# Altium PCB RGBM.PcbDoc (part 1 of 3)
Units mil, origin at the board's own origin, x right, y up, seen from the top; angles counter-clockwise.
Board outline 10650 x 5000 mil, 2 copper layers (Top Layer, Bottom Layer); 598 components, 309 nets, 1806 pads, 0 vias.
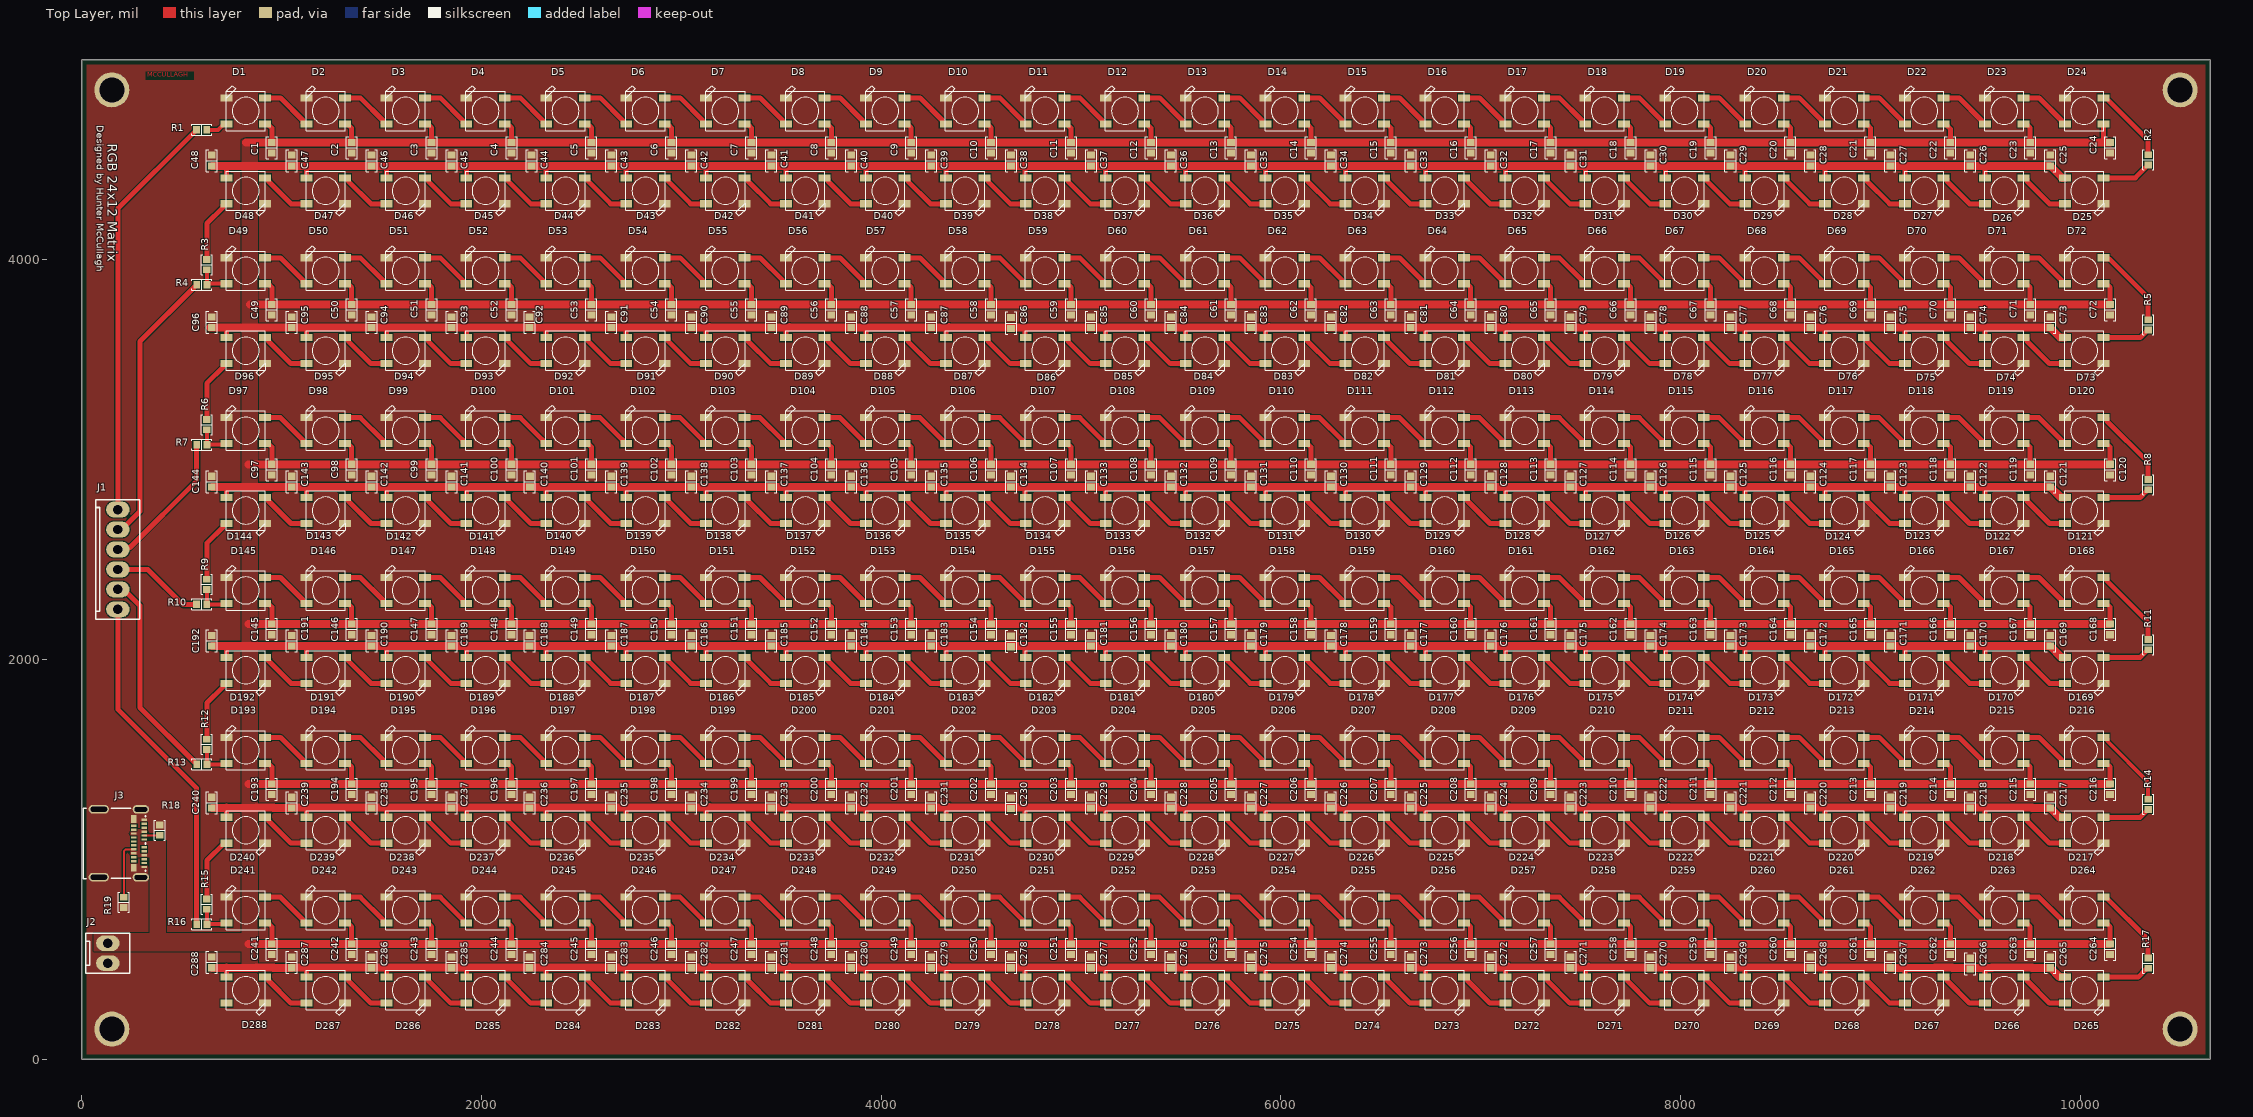
[diagram p0: Top Layer view]
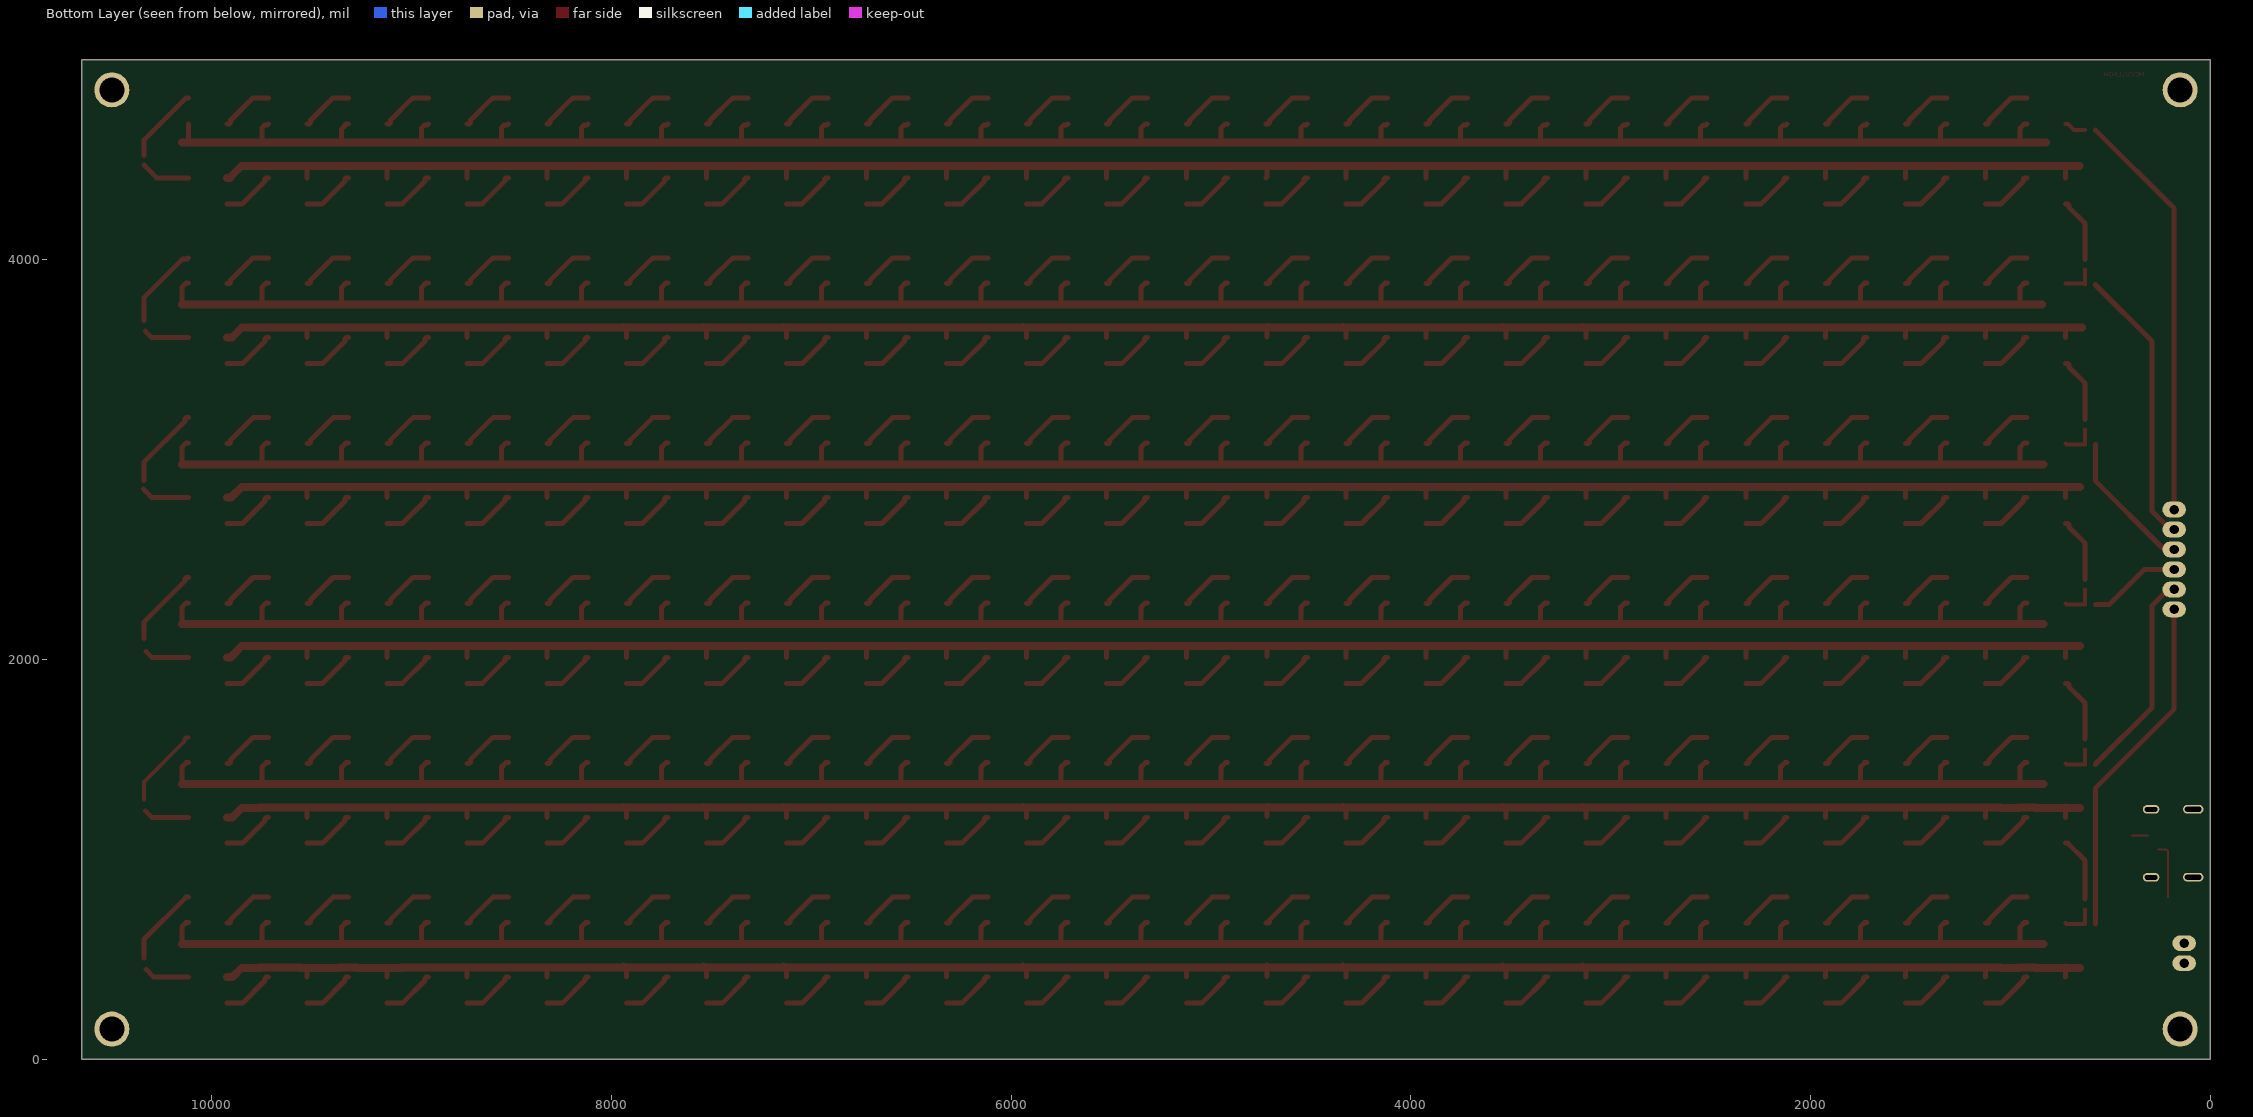
[diagram p1: Bottom Layer view, seen from below]
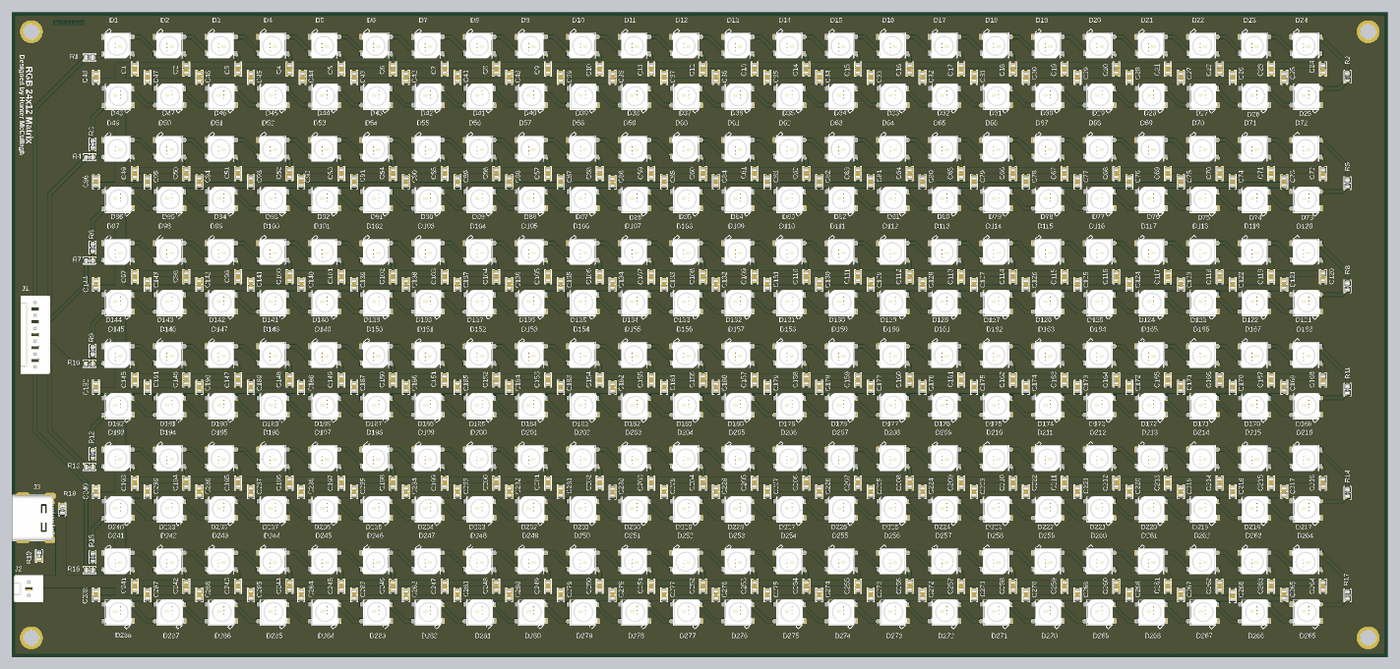
[diagram p4: 3D render of the assembled board from above, using the file's embedded part models]

## Layer stack, top to bottom
Top Solder: solder mask 0.4, Solder Resist, Dk 3.5
Top Layer: signal copper 1.4
Dielectric 1: dielectric 12.6, FR-4, Dk 4.8
Bottom Layer: signal copper 1.4
Bottom Solder: solder mask 0.4, Solder Resist, Dk 3.5

## Board outline
0,0 10650,0 10650,5000 0,5000

## Design rules (kind name [scope] priority, off if disabled: settings)
Clearance [All] p1: gap=5 ignorepadtopadclearanceinfootprint=FALSE
HoleSize [All] p1: absolutevalues=TRUE maxlimit=1000 minlimit=1 maxpercent=80.000 minpercent=20.000
MinimumSolderMaskSliver [All] p1: minsoldermaskwidth=1
PolygonConnect PolygonConnect_1 [All vs IsNamedPolygon('GND_L01_P002')] p1: connectstyle=Direct reliefconductorwidth=10 reliefentries=4 polygonreliefangle="90 Angle" airgapwidth=10
PolygonConnect [All] p2: connectstyle=Relief reliefconductorwidth=10 reliefentries=4 polygonreliefangle="90 Angle" airgapwidth=10
RoutingVias [All] p1: holewidth=28 width=50 viastyle="Through Hole" minholewidth=28 minwidth=50 maxholewidth=28 maxwidth=50
SilkToSilkClearance [All] p1: silktosilkclearance=1
SilkToSolderMaskClearance [IsPad] p1: minsilkscreentomaskgap=0 clearancetoexposedcopper=TRUE
SolderMaskExpansion [All] p1: expansion=4 istentingtop=FALSE
SupplyNets "Schematic Supply Nets_1" [InNet('+5V')] p1: voltage=0.000
SupplyNets "Schematic Supply Nets" [InNet('GND')] p2: voltage=0.000
Width [All] p1: maxlimit=200 minlimit=10 preferedwidth=10
26 further rules are at their usual default settings.

## Classes and differential pairs
component class RGBM-07: J1 J2 J3 R18 R19
component class RGBM-06: C241 C242 C243 C244 C245 C246 C247 C248 C249 C250 C251 C252 C253 C254 C255 C256 C257 C258 C259 C260 C261 C262 C263 C264 C265 C266 C267 C268 C269 C270 C271 C272 C273 C274 C275 C276 C277 C278 C279 C280 C281 C282 C283 C284 C285 C286 C287 C288 D241 D242 D243 D244 D245 D246 D247 D248 D249 D250 D251 D252 D253 D254 D255 D256 D257 D258 D259 D260 D261 D262 D263 D264 D265 D266 D267 D268 D269 D270 D271 D272 D273 D274 D275 D276 D277 D278 D279 D280 D281 D282 D283 D284 D285 D286 D287 D288 R15 R16 R17
component class RGBM-05: C193 C194 C195 C196 C197 C198 C199 C200 C201 C202 C203 C204 C205 C206 C207 C208 C209 C210 C211 C212 C213 C214 C215 C216 C217 C218 C219 C220 C221 C222 C223 C224 C225 C226 C227 C228 C229 C230 C231 C232 C233 C234 C235 C236 C237 C238 C239 C240 D193 D194 D195 D196 D197 D198 D199 D200 D201 D202 D203 D204 D205 D206 D207 D208 D209 D210 D211 D212 D213 D214 D215 D216 D217 D218 D219 D220 D221 D222 D223 D224 D225 D226 D227 D228 D229 D230 D231 D232 D233 D234 D235 D236 D237 D238 D239 D240 R12 R13 R14
component class RGBM-04: C145 C146 C147 C148 C149 C150 C151 C152 C153 C154 C155 C156 C157 C158 C159 C160 C161 C162 C163 C164 C165 C166 C167 C168 C169 C170 C171 C172 C173 C174 C175 C176 C177 C178 C179 C180 C181 C182 C183 C184 C185 C186 C187 C188 C189 C190 C191 C192 D145 D146 D147 D148 D149 D150 D151 D152 D153 D154 D155 D156 D157 D158 D159 D160 D161 D162 D163 D164 D165 D166 D167 D168 D169 D170 D171 D172 D173 D174 D175 D176 D177 D178 D179 D180 D181 D182 D183 D184 D185 D186 D187 D188 D189 D190 D191 D192 R9 R10 R11
component class RGBM-03: C97 C98 C99 C100 C101 C102 C103 C104 C105 C106 C107 C108 C109 C110 C111 C112 C113 C114 C115 C116 C117 C118 C119 C120 C121 C122 C123 C124 C125 C126 C127 C128 C129 C130 C131 C132 C133 C134 C135 C136 C137 C138 C139 C140 C141 C142 C143 C144 D97 D98 D99 D100 D101 D102 D103 D104 D105 D106 D107 D108 D109 D110 D111 D112 D113 D114 D115 D116 D117 D118 D119 D120 D121 D122 D123 D124 D125 D126 D127 D128 D129 D130 D131 D132 D133 D134 D135 D136 D137 D138 D139 D140 D141 D142 D143 D144 R6 R7 R8
component class RGBM-02: C49 C50 C51 C52 C53 C54 C55 C56 C57 C58 C59 C60 C61 C62 C63 C64 C65 C66 C67 C68 C69 C70 C71 C72 C73 C74 C75 C76 C77 C78 C79 C80 C81 C82 C83 C84 C85 C86 C87 C88 C89 C90 C91 C92 C93 C94 C95 C96 D49 D50 D51 D52 D53 D54 D55 D56 D57 D58 D59 D60 D61 D62 D63 D64 D65 D66 D67 D68 D69 D70 D71 D72 D73 D74 D75 D76 D77 D78 D79 D80 D81 D82 D83 D84 D85 D86 D87 D88 D89 D90 D91 D92 D93 D94 D95 D96 R3 R4 R5
component class RGBM-01: C1 C2 C3 C4 C5 C6 C7 C8 C9 C10 C11 C12 C13 C14 C15 C16 C17 C18 C19 C20 C21 C22 C23 C24 C25 C26 C27 C28 C29 C30 C31 C32 C33 C34 C35 C36 C37 C38 C39 C40 C41 C42 C43 C44 C45 C46 C47 C48 D1 D2 D3 D4 D5 D6 D7 D8 D9 D10 D11 D12 D13 D14 D15 D16 D17 D18 D19 D20 D21 D22 D23 D24 D25 D26 D27 D28 D29 D30 D31 D32 D33 D34 D35 D36 D37 D38 D39 D40 D41 D42 D43 D44 D45 D46 D47 D48 R1 R2

## Components (designator, comment, footprint, x,y, rotation, side; value= is the part's Value field where it differs from the comment)
C1 "0.1 µF" "CAP 0603_1608" 950,4560 r90 top
C2 "0.1 µF" "CAP 0603_1608" 1350,4560 r90 top
C3 "0.1 µF" "CAP 0603_1608" 1750,4560 r90 top
C4 "0.1 µF" "CAP 0603_1608" 2150,4560 r90 top
C5 "0.1 µF" "CAP 0603_1608" 2550,4560 r90 top
C6 "0.1 µF" "CAP 0603_1608" 2950,4560 r90 top
C7 "0.1 µF" "CAP 0603_1608" 3350,4560 r90 top
C8 "0.1 µF" "CAP 0603_1608" 3750,4560 r90 top
C9 "0.1 µF" "CAP 0603_1608" 4150,4560 r90 top
C10 "0.1 µF" "CAP 0603_1608" 4550,4560 r90 top
C11 "0.1 µF" "CAP 0603_1608" 4950,4560 r90 top
C12 "0.1 µF" "CAP 0603_1608" 5350,4560 r90 top
C13 "0.1 µF" "CAP 0603_1608" 5750,4560 r90 top
C14 "0.1 µF" "CAP 0603_1608" 6150,4560 r90 top
C15 "0.1 µF" "CAP 0603_1608" 6550,4560 r90 top
C16 "0.1 µF" "CAP 0603_1608" 6950,4560 r90 top
C17 "0.1 µF" "CAP 0603_1608" 7350,4560 r90 top
C18 "0.1 µF" "CAP 0603_1608" 7750,4560 r90 top
C19 "0.1 µF" "CAP 0603_1608" 8150,4560 r90 top
C20 "0.1 µF" "CAP 0603_1608" 8550,4560 r90 top
C21 "0.1 µF" "CAP 0603_1608" 8950,4560 r90 top
C22 "0.1 µF" "CAP 0603_1608" 9350,4560 r90 top
C23 "0.1 µF" "CAP 0603_1608" 9750,4560 r90 top
C24 "0.1 µF" "CAP 0603_1608" 10150,4560 r90 top
C25 "0.1 µF" "CAP 0603_1608" 9850,4496.57 r270 top
C26 "0.1 µF" "CAP 0603_1608" 9450,4496.57 r270 top
C27 "0.1 µF" "CAP 0603_1608" 9050,4496.57 r270 top
C28 "0.1 µF" "CAP 0603_1608" 8650,4496.57 r270 top
C29 "0.1 µF" "CAP 0603_1608" 8250,4496.57 r270 top
C30 "0.1 µF" "CAP 0603_1608" 7850,4496.57 r270 top
C31 "0.1 µF" "CAP 0603_1608" 7450,4496.57 r270 top
C32 "0.1 µF" "CAP 0603_1608" 7050,4496.57 r270 top
C33 "0.1 µF" "CAP 0603_1608" 6650,4496.57 r270 top
C34 "0.1 µF" "CAP 0603_1608" 6250,4496.57 r270 top
C35 "0.1 µF" "CAP 0603_1608" 5850,4496.57 r270 top
C36 "0.1 µF" "CAP 0603_1608" 5450,4496.57 r270 top
C37 "0.1 µF" "CAP 0603_1608" 5050,4496.57 r270 top
C38 "0.1 µF" "CAP 0603_1608" 4650,4496.57 r270 top
C39 "0.1 µF" "CAP 0603_1608" 4250,4496.57 r270 top
C40 "0.1 µF" "CAP 0603_1608" 3850,4496.57 r270 top
C41 "0.1 µF" "CAP 0603_1608" 3450,4496.57 r270 top
C42 "0.1 µF" "CAP 0603_1608" 3050,4496.57 r270 top
C43 "0.1 µF" "CAP 0603_1608" 2650,4496.57 r270 top
C44 "0.1 µF" "CAP 0603_1608" 2250,4496.57 r270 top
C45 "0.1 µF" "CAP 0603_1608" 1850,4496.57 r270 top
C46 "0.1 µF" "CAP 0603_1608" 1450,4496.57 r270 top
C47 "0.1 µF" "CAP 0603_1608" 1050,4496.57 r270 top
C48 "0.1 µF" "CAP 0603_1608" 650,4496.57 r270 top
C49 "0.1 µF" "CAP 0603_1608" 950,3750 r90 top
C50 "0.1 µF" "CAP 0603_1608" 1350,3750 r90 top
C51 "0.1 µF" "CAP 0603_1608" 1750,3750 r90 top
C52 "0.1 µF" "CAP 0603_1608" 2150,3750 r90 top
C53 "0.1 µF" "CAP 0603_1608" 2550,3750 r90 top
C54 "0.1 µF" "CAP 0603_1608" 2950,3750 r90 top
C55 "0.1 µF" "CAP 0603_1608" 3350,3750 r90 top
C56 "0.1 µF" "CAP 0603_1608" 3750,3750 r90 top
C57 "0.1 µF" "CAP 0603_1608" 4150,3750 r90 top
C58 "0.1 µF" "CAP 0603_1608" 4550,3750 r90 top
C59 "0.1 µF" "CAP 0603_1608" 4950,3750 r90 top
C60 "0.1 µF" "CAP 0603_1608" 5350,3750 r90 top
C61 "0.1 µF" "CAP 0603_1608" 5750,3750 r90 top
C62 "0.1 µF" "CAP 0603_1608" 6150,3750 r90 top
C63 "0.1 µF" "CAP 0603_1608" 6550,3750 r90 top
C64 "0.1 µF" "CAP 0603_1608" 6950,3750 r90 top
C65 "0.1 µF" "CAP 0603_1608" 7350,3750 r90 top
C66 "0.1 µF" "CAP 0603_1608" 7750,3750 r90 top
C67 "0.1 µF" "CAP 0603_1608" 8150,3750 r90 top
C68 "0.1 µF" "CAP 0603_1608" 8550,3750 r90 top
C69 "0.1 µF" "CAP 0603_1608" 8950,3750 r90 top
C70 "0.1 µF" "CAP 0603_1608" 9350,3750 r90 top
C71 "0.1 µF" "CAP 0603_1608" 9750,3750 r90 top
C72 "0.1 µF" "CAP 0603_1608" 10150,3750 r90 top
C73 "0.1 µF" "CAP 0603_1608" 9850,3686.57 r270 top
C74 "0.1 µF" "CAP 0603_1608" 9450,3686.57 r270 top
C75 "0.1 µF" "CAP 0603_1608" 9050,3686.57 r270 top
C76 "0.1 µF" "CAP 0603_1608" 8650,3686.57 r270 top
C77 "0.1 µF" "CAP 0603_1608" 8250,3686.57 r270 top
C78 "0.1 µF" "CAP 0603_1608" 7850,3686.57 r270 top
C79 "0.1 µF" "CAP 0603_1608" 7450,3686.57 r270 top
C80 "0.1 µF" "CAP 0603_1608" 7050,3686.57 r270 top
C81 "0.1 µF" "CAP 0603_1608" 6650,3686.57 r270 top
C82 "0.1 µF" "CAP 0603_1608" 6250,3686.57 r270 top
C83 "0.1 µF" "CAP 0603_1608" 5850,3686.57 r270 top
C84 "0.1 µF" "CAP 0603_1608" 5450,3686.57 r270 top
C85 "0.1 µF" "CAP 0603_1608" 5050,3686.57 r270 top
C86 "0.1 µF" "CAP 0603_1608" 4650,3683.43 r270 top
C87 "0.1 µF" "CAP 0603_1608" 4250,3686.57 r270 top
C88 "0.1 µF" "CAP 0603_1608" 3850,3686.57 r270 top
C89 "0.1 µF" "CAP 0603_1608" 3450,3686.57 r270 top
C90 "0.1 µF" "CAP 0603_1608" 3050,3686.57 r270 top
C91 "0.1 µF" "CAP 0603_1608" 2650,3686.57 r270 top
C92 "0.1 µF" "CAP 0603_1608" 2240,3686.57 r270 top
C93 "0.1 µF" "CAP 0603_1608" 1850,3686.57 r270 top
C94 "0.1 µF" "CAP 0603_1608" 1450,3686.57 r270 top
C95 "0.1 µF" "CAP 0603_1608" 1050,3686.57 r270 top
C96 "0.1 µF" "CAP 0603_1608" 650,3686.57 r270 top
C97 "0.1 µF" "CAP 0603_1608" 950,2950 r90 top
C98 "0.1 µF" "CAP 0603_1608" 1350,2950 r90 top
C99 "0.1 µF" "CAP 0603_1608" 1750,2950 r90 top
C100 "0.1 µF" "CAP 0603_1608" 2150,2950 r90 top
C101 "0.1 µF" "CAP 0603_1608" 2550,2950 r90 top
C102 "0.1 µF" "CAP 0603_1608" 2950,2950 r90 top
C103 "0.1 µF" "CAP 0603_1608" 3350,2950 r90 top
C104 "0.1 µF" "CAP 0603_1608" 3750,2950 r90 top
C105 "0.1 µF" "CAP 0603_1608" 4150,2950 r90 top
C106 "0.1 µF" "CAP 0603_1608" 4550,2950 r90 top
C107 "0.1 µF" "CAP 0603_1608" 4950,2950 r90 top
C108 "0.1 µF" "CAP 0603_1608" 5350,2950 r90 top
C109 "0.1 µF" "CAP 0603_1608" 5750,2950 r90 top
C110 "0.1 µF" "CAP 0603_1608" 6150,2950 r90 top
C111 "0.1 µF" "CAP 0603_1608" 6550,2950 r90 top
C112 "0.1 µF" "CAP 0603_1608" 6950,2950 r90 top
C113 "0.1 µF" "CAP 0603_1608" 7350,2950 r90 top
C114 "0.1 µF" "CAP 0603_1608" 7750,2950 r90 top
C115 "0.1 µF" "CAP 0603_1608" 8150,2950 r90 top
C116 "0.1 µF" "CAP 0603_1608" 8550,2950 r90 top
C117 "0.1 µF" "CAP 0603_1608" 8950,2950 r90 top
C118 "0.1 µF" "CAP 0603_1608" 9350,2950 r90 top
C119 "0.1 µF" "CAP 0603_1608" 9750,2950 r90 top
C120 "0.1 µF" "CAP 0603_1608" 10150,2950 r90 top
C121 "0.1 µF" "CAP 0603_1608" 9850,2890 r270 top
C122 "0.1 µF" "CAP 0603_1608" 9450,2890 r270 top
C123 "0.1 µF" "CAP 0603_1608" 9050,2890 r270 top
C124 "0.1 µF" "CAP 0603_1608" 8650,2890 r270 top
C125 "0.1 µF" "CAP 0603_1608" 8250,2890 r270 top
C126 "0.1 µF" "CAP 0603_1608" 7850,2890 r270 top
C127 "0.1 µF" "CAP 0603_1608" 7450,2890 r270 top
C128 "0.1 µF" "CAP 0603_1608" 7050,2890 r270 top
C129 "0.1 µF" "CAP 0603_1608" 6650,2890 r270 top
C130 "0.1 µF" "CAP 0603_1608" 6250,2890 r270 top
C131 "0.1 µF" "CAP 0603_1608" 5850,2890 r270 top
C132 "0.1 µF" "CAP 0603_1608" 5450,2890 r270 top
C133 "0.1 µF" "CAP 0603_1608" 5050,2890 r270 top
C134 "0.1 µF" "CAP 0603_1608" 4650,2890 r270 top
C135 "0.1 µF" "CAP 0603_1608" 4250,2890 r270 top
C136 "0.1 µF" "CAP 0603_1608" 3850,2890 r270 top
C137 "0.1 µF" "CAP 0603_1608" 3450,2890 r270 top
C138 "0.1 µF" "CAP 0603_1608" 3050,2890 r270 top
C139 "0.1 µF" "CAP 0603_1608" 2650,2890 r270 top
C140 "0.1 µF" "CAP 0603_1608" 2241.52,2890 r270 top
C141 "0.1 µF" "CAP 0603_1608" 1850,2890 r270 top
C142 "0.1 µF" "CAP 0603_1608" 1450,2890 r270 top
C143 "0.1 µF" "CAP 0603_1608" 1050,2890 r270 top
C144 "0.1 µF" "CAP 0603_1608" 650,2890 r270 top
C145 "0.1 µF" "CAP 0603_1608" 950,2150 r90 top
C146 "0.1 µF" "CAP 0603_1608" 1350,2150 r90 top
C147 "0.1 µF" "CAP 0603_1608" 1750,2150 r90 top
C148 "0.1 µF" "CAP 0603_1608" 2150,2150 r90 top
C149 "0.1 µF" "CAP 0603_1608" 2550,2150 r90 top
C150 "0.1 µF" "CAP 0603_1608" 2950,2150 r90 top
C151 "0.1 µF" "CAP 0603_1608" 3350,2150 r90 top
C152 "0.1 µF" "CAP 0603_1608" 3750,2150 r90 top
C153 "0.1 µF" "CAP 0603_1608" 4150,2150 r90 top
C154 "0.1 µF" "CAP 0603_1608" 4550,2150 r90 top
C155 "0.1 µF" "CAP 0603_1608" 4950,2150 r90 top
C156 "0.1 µF" "CAP 0603_1608" 5350,2150 r90 top
C157 "0.1 µF" "CAP 0603_1608" 5750,2150 r90 top
C158 "0.1 µF" "CAP 0603_1608" 6150,2150 r90 top
C159 "0.1 µF" "CAP 0603_1608" 6550,2150 r90 top
C160 "0.1 µF" "CAP 0603_1608" 6950,2150 r90 top
C161 "0.1 µF" "CAP 0603_1608" 7350,2150 r90 top
C162 "0.1 µF" "CAP 0603_1608" 7750,2150 r90 top
C163 "0.1 µF" "CAP 0603_1608" 8150,2150 r90 top
C164 "0.1 µF" "CAP 0603_1608" 8550,2150 r90 top
C165 "0.1 µF" "CAP 0603_1608" 8950,2150 r90 top
C166 "0.1 µF" "CAP 0603_1608" 9350,2150 r90 top
C167 "0.1 µF" "CAP 0603_1608" 9750,2150 r90 top
C168 "0.1 µF" "CAP 0603_1608" 10150,2150 r90 top
C169 "0.1 µF" "CAP 0603_1608" 9850,2093.43 r270 top
C170 "0.1 µF" "CAP 0603_1608" 9450,2093.43 r270 top
C171 "0.1 µF" "CAP 0603_1608" 9050,2093.43 r270 top
C172 "0.1 µF" "CAP 0603_1608" 8650,2093.43 r270 top
C173 "0.1 µF" "CAP 0603_1608" 8250,2093.43 r270 top
C174 "0.1 µF" "CAP 0603_1608" 7850,2093.43 r270 top
C175 "0.1 µF" "CAP 0603_1608" 7450,2093.43 r270 top
C176 "0.1 µF" "CAP 0603_1608" 7050,2093.43 r270 top
C177 "0.1 µF" "CAP 0603_1608" 6650,2093.43 r270 top
C178 "0.1 µF" "CAP 0603_1608" 6250,2093.43 r270 top
C179 "0.1 µF" "CAP 0603_1608" 5850,2093.43 r270 top
C180 "0.1 µF" "CAP 0603_1608" 5450,2093.43 r270 top
C181 "0.1 µF" "CAP 0603_1608" 5050,2093.43 r270 top
C182 "0.1 µF" "CAP 0603_1608" 4650,2090 r270 top
C183 "0.1 µF" "CAP 0603_1608" 4250,2093.43 r270 top
C184 "0.1 µF" "CAP 0603_1608" 3850,2093.43 r270 top
C185 "0.1 µF" "CAP 0603_1608" 3450,2093.43 r270 top
C186 "0.1 µF" "CAP 0603_1608" 3050,2093.43 r270 top
C187 "0.1 µF" "CAP 0603_1608" 2650,2093.43 r270 top
C188 "0.1 µF" "CAP 0603_1608" 2240,2093.43 r270 top
C189 "0.1 µF" "CAP 0603_1608" 1850,2093.43 r270 top
C190 "0.1 µF" "CAP 0603_1608" 1450,2093.43 r270 top
C191 "0.1 µF" "CAP 0603_1608" 1050,2093.43 r270 top
C192 "0.1 µF" "CAP 0603_1608" 650,2093.43 r270 top
C193 "0.1 µF" "CAP 0603_1608" 950,1350 r90 top
C194 "0.1 µF" "CAP 0603_1608" 1350,1350 r90 top
C195 "0.1 µF" "CAP 0603_1608" 1750,1350 r90 top
C196 "0.1 µF" "CAP 0603_1608" 2150,1350 r90 top
C197 "0.1 µF" "CAP 0603_1608" 2550,1350 r90 top
C198 "0.1 µF" "CAP 0603_1608" 2950,1350 r90 top
C199 "0.1 µF" "CAP 0603_1608" 3350,1350 r90 top
C200 "0.1 µF" "CAP 0603_1608" 3750,1350 r90 top
C201 "0.1 µF" "CAP 0603_1608" 4150,1350 r90 top
C202 "0.1 µF" "CAP 0603_1608" 4550,1350 r90 top
C203 "0.1 µF" "CAP 0603_1608" 4950,1350 r90 top
C204 "0.1 µF" "CAP 0603_1608" 5350,1350 r90 top
C205 "0.1 µF" "CAP 0603_1608" 5750,1350 r90 top
C206 "0.1 µF" "CAP 0603_1608" 6150,1350 r90 top
C207 "0.1 µF" "CAP 0603_1608" 6550,1350 r90 top
C208 "0.1 µF" "CAP 0603_1608" 6950,1350 r90 top
C209 "0.1 µF" "CAP 0603_1608" 7350,1350 r90 top
C210 "0.1 µF" "CAP 0603_1608" 7750,1350 r90 top
C211 "0.1 µF" "CAP 0603_1608" 8150,1350 r90 top
C212 "0.1 µF" "CAP 0603_1608" 8550,1350 r90 top
C213 "0.1 µF" "CAP 0603_1608" 8950,1350 r90 top
C214 "0.1 µF" "CAP 0603_1608" 9350,1350 r90 top
C215 "0.1 µF" "CAP 0603_1608" 9750,1350 r90 top
C216 "0.1 µF" "CAP 0603_1608" 10150,1350 r90 top
C217 "0.1 µF" "CAP 0603_1608" 9850,1283.43 r270 top
C218 "0.1 µF" "CAP 0603_1608" 9450,1283.43 r270 top
C219 "0.1 µF" "CAP 0603_1608" 9050,1283.43 r270 top
C220 "0.1 µF" "CAP 0603_1608" 8650,1283.43 r270 top
C221 "0.1 µF" "CAP 0603_1608" 8250,1283.43 r270 top
C222 "0.1 µF" "CAP 0603_1608" 7850,1283.43 r270 top
C223 "0.1 µF" "CAP 0603_1608" 7450,1283.43 r270 top
C224 "0.1 µF" "CAP 0603_1608" 7050,1283.43 r270 top
C225 "0.1 µF" "CAP 0603_1608" 6650,1283.43 r270 top
C226 "0.1 µF" "CAP 0603_1608" 6250,1283.43 r270 top
C227 "0.1 µF" "CAP 0603_1608" 5850,1283.43 r270 top
C228 "0.1 µF" "CAP 0603_1608" 5450,1283.43 r270 top
C229 "0.1 µF" "CAP 0603_1608" 5050,1283.43 r270 top
C230 "0.1 µF" "CAP 0603_1608" 4650,1280 r270 top
C231 "0.1 µF" "CAP 0603_1608" 4250,1283.43 r270 top
C232 "0.1 µF" "CAP 0603_1608" 3850,1283.43 r270 top
C233 "0.1 µF" "CAP 0603_1608" 3450,1283.43 r270 top
C234 "0.1 µF" "CAP 0603_1608" 3050,1283.43 r270 top
C235 "0.1 µF" "CAP 0603_1608" 2650,1283.43 r270 top
C236 "0.1 µF" "CAP 0603_1608" 2240,1283.43 r270 top
C237 "0.1 µF" "CAP 0603_1608" 1850,1283.43 r270 top
C238 "0.1 µF" "CAP 0603_1608" 1450,1283.43 r270 top
C239 "0.1 µF" "CAP 0603_1608" 1050,1283.43 r270 top
C240 "0.1 µF" "CAP 0603_1608" 650,1283.43 r270 top
C241 "0.1 µF" "CAP 0603_1608" 950,550 r90 top
C242 "0.1 µF" "CAP 0603_1608" 1350,550 r90 top
C243 "0.1 µF" "CAP 0603_1608" 1750,550 r90 top
C244 "0.1 µF" "CAP 0603_1608" 2150,550 r90 top
C245 "0.1 µF" "CAP 0603_1608" 2550,550 r90 top
C246 "0.1 µF" "CAP 0603_1608" 2950,550 r90 top
C247 "0.1 µF" "CAP 0603_1608" 3350,550 r90 top
C248 "0.1 µF" "CAP 0603_1608" 3750,550 r90 top
C249 "0.1 µF" "CAP 0603_1608" 4150,550 r90 top
C250 "0.1 µF" "CAP 0603_1608" 4550,550 r90 top
C251 "0.1 µF" "CAP 0603_1608" 4950,550 r90 top
C252 "0.1 µF" "CAP 0603_1608" 5350,550 r90 top
C253 "0.1 µF" "CAP 0603_1608" 5750,550 r90 top
C254 "0.1 µF" "CAP 0603_1608" 6150,550 r90 top
C255 "0.1 µF" "CAP 0603_1608" 6550,550 r90 top
C256 "0.1 µF" "CAP 0603_1608" 6950,550 r90 top
C257 "0.1 µF" "CAP 0603_1608" 7350,550 r90 top
C258 "0.1 µF" "CAP 0603_1608" 7750,550 r90 top
C259 "0.1 µF" "CAP 0603_1608" 8150,550 r90 top
C260 "0.1 µF" "CAP 0603_1608" 8550,550 r90 top
C261 "0.1 µF" "CAP 0603_1608" 8950,550 r90 top
C262 "0.1 µF" "CAP 0603_1608" 9350,550 r90 top
C263 "0.1 µF" "CAP 0603_1608" 9750,550 r90 top
C264 "0.1 µF" "CAP 0603_1608" 10150,550 r90 top
C265 "0.1 µF" "CAP 0603_1608" 9850,483.43 r270 top
C266 "0.1 µF" "CAP 0603_1608" 9450,478.03 r270 top
C267 "0.1 µF" "CAP 0603_1608" 9050,483.43 r270 top
C268 "0.1 µF" "CAP 0603_1608" 8650,483.43 r270 top
C269 "0.1 µF" "CAP 0603_1608" 8250,483.43 r270 top
C270 "0.1 µF" "CAP 0603_1608" 7850,483.43 r270 top
C271 "0.1 µF" "CAP 0603_1608" 7450,483.43 r270 top
C272 "0.1 µF" "CAP 0603_1608" 7050,483.43 r270 top
C273 "0.1 µF" "CAP 0603_1608" 6650,483.43 r270 top
C274 "0.1 µF" "CAP 0603_1608" 6250,483.43 r270 top
C275 "0.1 µF" "CAP 0603_1608" 5850,483.43 r270 top
C276 "0.1 µF" "CAP 0603_1608" 5450,483.43 r270 top
C277 "0.1 µF" "CAP 0603_1608" 5050,483.43 r270 top
C278 "0.1 µF" "CAP 0603_1608" 4650,483.43 r270 top
C279 "0.1 µF" "CAP 0603_1608" 4250,483.43 r270 top
C280 "0.1 µF" "CAP 0603_1608" 3850,483.43 r270 top
C281 "0.1 µF" "CAP 0603_1608" 3450,483.43 r270 top
C282 "0.1 µF" "CAP 0603_1608" 3050,483.43 r270 top
C283 "0.1 µF" "CAP 0603_1608" 2650,483.43 r270 top
C284 "0.1 µF" "CAP 0603_1608" 2240,483.43 r270 top
C285 "0.1 µF" "CAP 0603_1608" 1850,483.43 r270 top
C286 "0.1 µF" "CAP 0603_1608" 1450,483.43 r270 top
C287 "0.1 µF" "CAP 0603_1608" 1050,483.43 r270 top
C288 "0.1 µF" "CAP 0603_1608" 650,483.43 r270 top
D1 "WS2812B" *WS2812B_WS2812B(Primary) 820,4745 r0 top
D2 "WS2812B" *WS2812B_WS2812B(Primary) 1220,4745 r0 top
D3 "WS2812B" *WS2812B_WS2812B(Primary) 1620,4745 r0 top
D4 "WS2812B" *WS2812B_WS2812B(Primary) 2020,4745 r0 top
D5 "WS2812B" *WS2812B_WS2812B(Primary) 2420,4745 r0 top
D6 "WS2812B" *WS2812B_WS2812B(Primary) 2820,4745 r0 top
D7 "WS2812B" *WS2812B_WS2812B(Primary) 3220,4745 r0 top
D8 "WS2812B" *WS2812B_WS2812B(Primary) 3620,4745 r0 top
D9 "WS2812B" *WS2812B_WS2812B(Primary) 4020,4745 r0 top
D10 "WS2812B" *WS2812B_WS2812B(Primary) 4420,4745 r0 top
D11 "WS2812B" *WS2812B_WS2812B(Primary) 4820,4745 r0 top
D12 "WS2812B" *WS2812B_WS2812B(Primary) 5220,4745 r0 top
D13 "WS2812B" *WS2812B_WS2812B(Primary) 5620,4745 r0 top
D14 "WS2812B" *WS2812B_WS2812B(Primary) 6020,4745 r0 top
D15 "WS2812B" *WS2812B_WS2812B(Primary) 6420,4745 r0 top
D16 "WS2812B" *WS2812B_WS2812B(Primary) 6820,4745 r0 top
D17 "WS2812B" *WS2812B_WS2812B(Primary) 7220,4745 r0 top
D18 "WS2812B" *WS2812B_WS2812B(Primary) 7620,4745 r0 top
D19 "WS2812B" *WS2812B_WS2812B(Primary) 8020,4745 r0 top
D20 "WS2812B" *WS2812B_WS2812B(Primary) 8420,4745 r0 top
D21 "WS2812B" *WS2812B_WS2812B(Primary) 8820,4745 r0 top
D22 "WS2812B" *WS2812B_WS2812B(Primary) 9220,4745 r0 top
D23 "WS2812B" *WS2812B_WS2812B(Primary) 9620,4745 r0 top
D24 "WS2812B" *WS2812B_WS2812B(Primary) 10020,4745 r0 top
D25 "WS2812B" *WS2812B_WS2812B(Primary) 10020,4345 r180 top
D26 "WS2812B" *WS2812B_WS2812B(Primary) 9620,4345 r180 top
D27 "WS2812B" *WS2812B_WS2812B(Primary) 9220,4345 r180 top
D28 "WS2812B" *WS2812B_WS2812B(Primary) 8820,4345 r180 top
D29 "WS2812B" *WS2812B_WS2812B(Primary) 8420,4345 r180 top
D30 "WS2812B" *WS2812B_WS2812B(Primary) 8020,4345 r180 top
D31 "WS2812B" *WS2812B_WS2812B(Primary) 7620,4345 r180 top
D32 "WS2812B" *WS2812B_WS2812B(Primary) 7220,4345 r180 top
D33 "WS2812B" *WS2812B_WS2812B(Primary) 6820,4345 r180 top
D34 "WS2812B" *WS2812B_WS2812B(Primary) 6420,4345 r180 top
D35 "WS2812B" *WS2812B_WS2812B(Primary) 6020,4345 r180 top
D36 "WS2812B" *WS2812B_WS2812B(Primary) 5620,4345 r180 top
D37 "WS2812B" *WS2812B_WS2812B(Primary) 5220,4345 r180 top
D38 "WS2812B" *WS2812B_WS2812B(Primary) 4820,4345 r180 top
D39 "WS2812B" *WS2812B_WS2812B(Primary) 4420,4345 r180 top
D40 "WS2812B" *WS2812B_WS2812B(Primary) 4020,4345 r180 top
D41 "WS2812B" *WS2812B_WS2812B(Primary) 3620,4345 r180 top
D42 "WS2812B" *WS2812B_WS2812B(Primary) 3220,4345 r180 top
D43 "WS2812B" *WS2812B_WS2812B(Primary) 2820,4345 r180 top
D44 "WS2812B" *WS2812B_WS2812B(Primary) 2420,4345 r180 top
D45 "WS2812B" *WS2812B_WS2812B(Primary) 2020,4345 r180 top
D46 "WS2812B" *WS2812B_WS2812B(Primary) 1620,4345 r180 top
D47 "WS2812B" *WS2812B_WS2812B(Primary) 1220,4345 r180 top
D48 "WS2812B" *WS2812B_WS2812B(Primary) 820,4345 r180 top
D49 "WS2812B" *WS2812B_WS2812B(Primary) 820,3945 r0 top
D50 "WS2812B" *WS2812B_WS2812B(Primary) 1220,3945 r0 top
D51 "WS2812B" *WS2812B_WS2812B(Primary) 1620,3945 r0 top
D52 "WS2812B" *WS2812B_WS2812B(Primary) 2020,3945 r0 top
D53 "WS2812B" *WS2812B_WS2812B(Primary) 2420,3945 r0 top
D54 "WS2812B" *WS2812B_WS2812B(Primary) 2820,3945 r0 top
D55 "WS2812B" *WS2812B_WS2812B(Primary) 3220,3945 r0 top
D56 "WS2812B" *WS2812B_WS2812B(Primary) 3620,3945 r0 top
D57 "WS2812B" *WS2812B_WS2812B(Primary) 4020,3945 r0 top
D58 "WS2812B" *WS2812B_WS2812B(Primary) 4420,3945 r0 top
D59 "WS2812B" *WS2812B_WS2812B(Primary) 4820,3945 r0 top
D60 "WS2812B" *WS2812B_WS2812B(Primary) 5220,3945 r0 top
D61 "WS2812B" *WS2812B_WS2812B(Primary) 5620,3945 r0 top
D62 "WS2812B" *WS2812B_WS2812B(Primary) 6020,3945 r0 top
D63 "WS2812B" *WS2812B_WS2812B(Primary) 6420,3945 r0 top
D64 "WS2812B" *WS2812B_WS2812B(Primary) 6820,3945 r0 top
D65 "WS2812B" *WS2812B_WS2812B(Primary) 7220,3945 r0 top
D66 "WS2812B" *WS2812B_WS2812B(Primary) 7620,3945 r0 top
D67 "WS2812B" *WS2812B_WS2812B(Primary) 8020,3945 r0 top
D68 "WS2812B" *WS2812B_WS2812B(Primary) 8420,3945 r0 top
D69 "WS2812B" *WS2812B_WS2812B(Primary) 8820,3945 r0 top
D70 "WS2812B" *WS2812B_WS2812B(Primary) 9220,3945 r0 top
D71 "WS2812B" *WS2812B_WS2812B(Primary) 9620,3945 r0 top
D72 "WS2812B" *WS2812B_WS2812B(Primary) 10020,3945 r0 top
D73 "WS2812B" *WS2812B_WS2812B(Primary) 10020,3545 r180 top
D74 "WS2812B" *WS2812B_WS2812B(Primary) 9620,3545 r180 top
D75 "WS2812B" *WS2812B_WS2812B(Primary) 9220,3545 r180 top
D76 "WS2812B" *WS2812B_WS2812B(Primary) 8820,3545 r180 top
D77 "WS2812B" *WS2812B_WS2812B(Primary) 8420,3545 r180 top
D78 "WS2812B" *WS2812B_WS2812B(Primary) 8020,3545 r180 top
D79 "WS2812B" *WS2812B_WS2812B(Primary) 7620,3545 r180 top
D80 "WS2812B" *WS2812B_WS2812B(Primary) 7220,3545 r180 top
D81 "WS2812B" *WS2812B_WS2812B(Primary) 6820,3545 r180 top
D82 "WS2812B" *WS2812B_WS2812B(Primary) 6420,3545 r180 top
D83 "WS2812B" *WS2812B_WS2812B(Primary) 6020,3545 r180 top
D84 "WS2812B" *WS2812B_WS2812B(Primary) 5620,3545 r180 top
D85 "WS2812B" *WS2812B_WS2812B(Primary) 5220,3545 r180 top
D86 "WS2812B" *WS2812B_WS2812B(Primary) 4820,3545 r180 top
D87 "WS2812B" *WS2812B_WS2812B(Primary) 4420,3545 r180 top
D88 "WS2812B" *WS2812B_WS2812B(Primary) 4020,3545 r180 top
D89 "WS2812B" *WS2812B_WS2812B(Primary) 3620,3545 r180 top
D90 "WS2812B" *WS2812B_WS2812B(Primary) 3220,3545 r180 top
D91 "WS2812B" *WS2812B_WS2812B(Primary) 2820,3545 r180 top
D92 "WS2812B" *WS2812B_WS2812B(Primary) 2420,3545 r180 top
D93 "WS2812B" *WS2812B_WS2812B(Primary) 2020,3545 r180 top
D94 "WS2812B" *WS2812B_WS2812B(Primary) 1620,3545 r180 top
D95 "WS2812B" *WS2812B_WS2812B(Primary) 1220,3545 r180 top
D96 "WS2812B" *WS2812B_WS2812B(Primary) 820,3545 r180 top
D97 "WS2812B" *WS2812B_WS2812B(Primary) 820,3145 r0 top
D98 "WS2812B" *WS2812B_WS2812B(Primary) 1220,3145 r0 top
D99 "WS2812B" *WS2812B_WS2812B(Primary) 1620,3145 r0 top
D100 "WS2812B" *WS2812B_WS2812B(Primary) 2020,3145 r0 top
D101 "WS2812B" *WS2812B_WS2812B(Primary) 2420,3145 r0 top
D102 "WS2812B" *WS2812B_WS2812B(Primary) 2820,3145 r0 top
D103 "WS2812B" *WS2812B_WS2812B(Primary) 3220,3145 r0 top
D104 "WS2812B" *WS2812B_WS2812B(Primary) 3620,3145 r0 top
D105 "WS2812B" *WS2812B_WS2812B(Primary) 4020,3145 r0 top
D106 "WS2812B" *WS2812B_WS2812B(Primary) 4420,3145 r0 top
D107 "WS2812B" *WS2812B_WS2812B(Primary) 4820,3145 r0 top
D108 "WS2812B" *WS2812B_WS2812B(Primary) 5220,3145 r0 top
D109 "WS2812B" *WS2812B_WS2812B(Primary) 5620,3145 r0 top
D110 "WS2812B" *WS2812B_WS2812B(Primary) 6020,3145 r0 top
D111 "WS2812B" *WS2812B_WS2812B(Primary) 6420,3145 r0 top
D112 "WS2812B" *WS2812B_WS2812B(Primary) 6820,3145 r0 top
D113 "WS2812B" *WS2812B_WS2812B(Primary) 7220,3145 r0 top
D114 "WS2812B" *WS2812B_WS2812B(Primary) 7620,3145 r0 top
D115 "WS2812B" *WS2812B_WS2812B(Primary) 8020,3145 r0 top
D116 "WS2812B" *WS2812B_WS2812B(Primary) 8420,3145 r0 top
D117 "WS2812B" *WS2812B_WS2812B(Primary) 8820,3145 r0 top
D118 "WS2812B" *WS2812B_WS2812B(Primary) 9220,3145 r0 top
D119 "WS2812B" *WS2812B_WS2812B(Primary) 9620,3145 r0 top
D120 "WS2812B" *WS2812B_WS2812B(Primary) 10020,3145 r0 top
D121 "WS2812B" *WS2812B_WS2812B(Primary) 10020,2745 r180 top
D122 "WS2812B" *WS2812B_WS2812B(Primary) 9620,2745 r180 top
D123 "WS2812B" *WS2812B_WS2812B(Primary) 9220,2745 r180 top
D124 "WS2812B" *WS2812B_WS2812B(Primary) 8820,2745 r180 top
D125 "WS2812B" *WS2812B_WS2812B(Primary) 8420,2745 r180 top
D126 "WS2812B" *WS2812B_WS2812B(Primary) 8020,2745 r180 top
D127 "WS2812B" *WS2812B_WS2812B(Primary) 7620,2745 r180 top
D128 "WS2812B" *WS2812B_WS2812B(Primary) 7220,2745 r180 top
D129 "WS2812B" *WS2812B_WS2812B(Primary) 6820,2745 r180 top
D130 "WS2812B" *WS2812B_WS2812B(Primary) 6420,2745 r180 top
D131 "WS2812B" *WS2812B_WS2812B(Primary) 6020,2745 r180 top
D132 "WS2812B" *WS2812B_WS2812B(Primary) 5620,2745 r180 top
D133 "WS2812B" *WS2812B_WS2812B(Primary) 5220,2745 r180 top
D134 "WS2812B" *WS2812B_WS2812B(Primary) 4820,2745 r180 top
D135 "WS2812B" *WS2812B_WS2812B(Primary) 4420,2745 r180 top
D136 "WS2812B" *WS2812B_WS2812B(Primary) 4020,2745 r180 top
D137 "WS2812B" *WS2812B_WS2812B(Primary) 3620,2745 r180 top
D138 "WS2812B" *WS2812B_WS2812B(Primary) 3220,2745 r180 top
D139 "WS2812B" *WS2812B_WS2812B(Primary) 2820,2745 r180 top
D140 "WS2812B" *WS2812B_WS2812B(Primary) 2420,2745 r180 top
D141 "WS2812B" *WS2812B_WS2812B(Primary) 2020,2745 r180 top
D142 "WS2812B" *WS2812B_WS2812B(Primary) 1620,2745 r180 top
D143 "WS2812B" *WS2812B_WS2812B(Primary) 1220,2745 r180 top
D144 "WS2812B" *WS2812B_WS2812B(Primary) 820,2745 r180 top
D145 "WS2812B" *WS2812B_WS2812B(Primary) 820,2345 r0 top
D146 "WS2812B" *WS2812B_WS2812B(Primary) 1220,2345 r0 top
D147 "WS2812B" *WS2812B_WS2812B(Primary) 1620,2345 r0 top
D148 "WS2812B" *WS2812B_WS2812B(Primary) 2020,2345 r0 top
D149 "WS2812B" *WS2812B_WS2812B(Primary) 2420,2345 r0 top
D150 "WS2812B" *WS2812B_WS2812B(Primary) 2820,2345 r0 top
D151 "WS2812B" *WS2812B_WS2812B(Primary) 3220,2345 r0 top
D152 "WS2812B" *WS2812B_WS2812B(Primary) 3620,2345 r0 top
D153 "WS2812B" *WS2812B_WS2812B(Primary) 4020,2345 r0 top
D154 "WS2812B" *WS2812B_WS2812B(Primary) 4420,2345 r0 top
D155 "WS2812B" *WS2812B_WS2812B(Primary) 4820,2345 r0 top
D156 "WS2812B" *WS2812B_WS2812B(Primary) 5220,2345 r0 top
D157 "WS2812B" *WS2812B_WS2812B(Primary) 5620,2345 r0 top
D158 "WS2812B" *WS2812B_WS2812B(Primary) 6020,2345 r0 top
D159 "WS2812B" *WS2812B_WS2812B(Primary) 6420,2345 r0 top
D160 "WS2812B" *WS2812B_WS2812B(Primary) 6820,2345 r0 top
D161 "WS2812B" *WS2812B_WS2812B(Primary) 7220,2345 r0 top
D162 "WS2812B" *WS2812B_WS2812B(Primary) 7620,2345 r0 top
D163 "WS2812B" *WS2812B_WS2812B(Primary) 8020,2345 r0 top
D164 "WS2812B" *WS2812B_WS2812B(Primary) 8420,2345 r0 top
D165 "WS2812B" *WS2812B_WS2812B(Primary) 8820,2345 r0 top
D166 "WS2812B" *WS2812B_WS2812B(Primary) 9220,2345 r0 top
D167 "WS2812B" *WS2812B_WS2812B(Primary) 9620,2345 r0 top
D168 "WS2812B" *WS2812B_WS2812B(Primary) 10020,2345 r0 top
D169 "WS2812B" *WS2812B_WS2812B(Primary) 10020,1945 r180 top
D170 "WS2812B" *WS2812B_WS2812B(Primary) 9620,1945 r180 top
D171 "WS2812B" *WS2812B_WS2812B(Primary) 9220,1945 r180 top
D172 "WS2812B" *WS2812B_WS2812B(Primary) 8820,1945 r180 top
D173 "WS2812B" *WS2812B_WS2812B(Primary) 8420,1945 r180 top
D174 "WS2812B" *WS2812B_WS2812B(Primary) 8020,1945 r180 top
D175 "WS2812B" *WS2812B_WS2812B(Primary) 7620,1945 r180 top
D176 "WS2812B" *WS2812B_WS2812B(Primary) 7220,1945 r180 top
D177 "WS2812B" *WS2812B_WS2812B(Primary) 6820,1945 r180 top
D178 "WS2812B" *WS2812B_WS2812B(Primary) 6420,1945 r180 top
D179 "WS2812B" *WS2812B_WS2812B(Primary) 6020,1945 r180 top
D180 "WS2812B" *WS2812B_WS2812B(Primary) 5620,1945 r180 top
D181 "WS2812B" *WS2812B_WS2812B(Primary) 5220,1945 r180 top
D182 "WS2812B" *WS2812B_WS2812B(Primary) 4820,1945 r180 top
D183 "WS2812B" *WS2812B_WS2812B(Primary) 4420,1945 r180 top
D184 "WS2812B" *WS2812B_WS2812B(Primary) 4020,1945 r180 top
D185 "WS2812B" *WS2812B_WS2812B(Primary) 3620,1945 r180 top
D186 "WS2812B" *WS2812B_WS2812B(Primary) 3220,1945 r180 top
D187 "WS2812B" *WS2812B_WS2812B(Primary) 2820,1945 r180 top
D188 "WS2812B" *WS2812B_WS2812B(Primary) 2420,1945 r180 top
D189 "WS2812B" *WS2812B_WS2812B(Primary) 2020,1945 r180 top
D190 "WS2812B" *WS2812B_WS2812B(Primary) 1620,1945 r180 top
D191 "WS2812B" *WS2812B_WS2812B(Primary) 1220,1945 r180 top
D192 "WS2812B" *WS2812B_WS2812B(Primary) 820,1945 r180 top
D193 "WS2812B" *WS2812B_WS2812B(Primary) 820,1545 r0 top
D194 "WS2812B" *WS2812B_WS2812B(Primary) 1220,1545 r0 top
D195 "WS2812B" *WS2812B_WS2812B(Primary) 1620,1545 r0 top
D196 "WS2812B" *WS2812B_WS2812B(Primary) 2020,1545 r0 top
D197 "WS2812B" *WS2812B_WS2812B(Primary) 2420,1545 r0 top
D198 "WS2812B" *WS2812B_WS2812B(Primary) 2820,1545 r0 top
D199 "WS2812B" *WS2812B_WS2812B(Primary) 3220,1545 r0 top
D200 "WS2812B" *WS2812B_WS2812B(Primary) 3620,1545 r0 top
D201 "WS2812B" *WS2812B_WS2812B(Primary) 4020,1545 r0 top
D202 "WS2812B" *WS2812B_WS2812B(Primary) 4420,1545 r0 top
D203 "WS2812B" *WS2812B_WS2812B(Primary) 4820,1545 r0 top
D204 "WS2812B" *WS2812B_WS2812B(Primary) 5220,1545 r0 top
D205 "WS2812B" *WS2812B_WS2812B(Primary) 5620,1545 r0 top
D206 "WS2812B" *WS2812B_WS2812B(Primary) 6020,1545 r0 top
D207 "WS2812B" *WS2812B_WS2812B(Primary) 6420,1545 r0 top
D208 "WS2812B" *WS2812B_WS2812B(Primary) 6820,1545 r0 top
D209 "WS2812B" *WS2812B_WS2812B(Primary) 7220,1545 r0 top
D210 "WS2812B" *WS2812B_WS2812B(Primary) 7620,1545 r0 top
D211 "WS2812B" *WS2812B_WS2812B(Primary) 8020,1545 r0 top
D212 "WS2812B" *WS2812B_WS2812B(Primary) 8420,1545 r0 top
D213 "WS2812B" *WS2812B_WS2812B(Primary) 8820,1545 r0 top
D214 "WS2812B" *WS2812B_WS2812B(Primary) 9220,1545 r0 top
D215 "WS2812B" *WS2812B_WS2812B(Primary) 9620,1545 r0 top
D216 "WS2812B" *WS2812B_WS2812B(Primary) 10020,1545 r0 top
D217 "WS2812B" *WS2812B_WS2812B(Primary) 10020,1145 r180 top
D218 "WS2812B" *WS2812B_WS2812B(Primary) 9620,1145 r180 top
D219 "WS2812B" *WS2812B_WS2812B(Primary) 9220,1145 r180 top
D220 "WS2812B" *WS2812B_WS2812B(Primary) 8820,1145 r180 top
D221 "WS2812B" *WS2812B_WS2812B(Primary) 8420,1145 r180 top
D222 "WS2812B" *WS2812B_WS2812B(Primary) 8020,1145 r180 top
D223 "WS2812B" *WS2812B_WS2812B(Primary) 7620,1145 r180 top
D224 "WS2812B" *WS2812B_WS2812B(Primary) 7220,1145 r180 top
D225 "WS2812B" *WS2812B_WS2812B(Primary) 6820,1145 r180 top
D226 "WS2812B" *WS2812B_WS2812B(Primary) 6420,1145 r180 top
D227 "WS2812B" *WS2812B_WS2812B(Primary) 6020,1145 r180 top
D228 "WS2812B" *WS2812B_WS2812B(Primary) 5620,1145 r180 top
D229 "WS2812B" *WS2812B_WS2812B(Primary) 5220,1145 r180 top
D230 "WS2812B" *WS2812B_WS2812B(Primary) 4820,1145 r180 top
D231 "WS2812B" *WS2812B_WS2812B(Primary) 4420,1145 r180 top
D232 "WS2812B" *WS2812B_WS2812B(Primary) 4020,1145 r180 top
D233 "WS2812B" *WS2812B_WS2812B(Primary) 3620,1145 r180 top
D234 "WS2812B" *WS2812B_WS2812B(Primary) 3220,1145 r180 top
D235 "WS2812B" *WS2812B_WS2812B(Primary) 2820,1145 r180 top
D236 "WS2812B" *WS2812B_WS2812B(Primary) 2420,1145 r180 top
D237 "WS2812B" *WS2812B_WS2812B(Primary) 2020,1145 r180 top
D238 "WS2812B" *WS2812B_WS2812B(Primary) 1620,1145 r180 top
D239 "WS2812B" *WS2812B_WS2812B(Primary) 1220,1145 r180 top
D240 "WS2812B" *WS2812B_WS2812B(Primary) 820,1145 r180 top
D241 "WS2812B" *WS2812B_WS2812B(Primary) 820,745 r0 top
D242 "WS2812B" *WS2812B_WS2812B(Primary) 1220,745 r0 top
D243 "WS2812B" *WS2812B_WS2812B(Primary) 1620,745 r0 top
D244 "WS2812B" *WS2812B_WS2812B(Primary) 2020,745 r0 top
D245 "WS2812B" *WS2812B_WS2812B(Primary) 2420,745 r0 top
D246 "WS2812B" *WS2812B_WS2812B(Primary) 2820,745 r0 top
D247 "WS2812B" *WS2812B_WS2812B(Primary) 3220,745 r0 top
D248 "WS2812B" *WS2812B_WS2812B(Primary) 3620,745 r0 top
D249 "WS2812B" *WS2812B_WS2812B(Primary) 4020,745 r0 top
D250 "WS2812B" *WS2812B_WS2812B(Primary) 4420,745 r0 top
D251 "WS2812B" *WS2812B_WS2812B(Primary) 4820,745 r0 top
D252 "WS2812B" *WS2812B_WS2812B(Primary) 5220,745 r0 top
D253 "WS2812B" *WS2812B_WS2812B(Primary) 5620,745 r0 top
D254 "WS2812B" *WS2812B_WS2812B(Primary) 6020,745 r0 top
D255 "WS2812B" *WS2812B_WS2812B(Primary) 6420,745 r0 top
D256 "WS2812B" *WS2812B_WS2812B(Primary) 6820,745 r0 top
D257 "WS2812B" *WS2812B_WS2812B(Primary) 7220,745 r0 top
D258 "WS2812B" *WS2812B_WS2812B(Primary) 7620,745 r0 top
D259 "WS2812B" *WS2812B_WS2812B(Primary) 8020,745 r0 top
D260 "WS2812B" *WS2812B_WS2812B(Primary) 8420,745 r0 top
D261 "WS2812B" *WS2812B_WS2812B(Primary) 8820,745 r0 top
D262 "WS2812B" *WS2812B_WS2812B(Primary) 9220,745 r0 top
D263 "WS2812B" *WS2812B_WS2812B(Primary) 9620,745 r0 top
D264 "WS2812B" *WS2812B_WS2812B(Primary) 10020,745 r0 top
D265 "WS2812B" *WS2812B_WS2812B(Primary) 10020,345 r180 top
D266 "WS2812B" *WS2812B_WS2812B(Primary) 9620,345 r180 top
D267 "WS2812B" *WS2812B_WS2812B(Primary) 9220,345 r180 top
D268 "WS2812B" *WS2812B_WS2812B(Primary) 8820,345 r180 top
D269 "WS2812B" *WS2812B_WS2812B(Primary) 8420,345 r180 top
D270 "WS2812B" *WS2812B_WS2812B(Primary) 8020,345 r180 top
D271 "WS2812B" *WS2812B_WS2812B(Primary) 7620,345 r180 top
D272 "WS2812B" *WS2812B_WS2812B(Primary) 7220,345 r180 top
D273 "WS2812B" *WS2812B_WS2812B(Primary) 6820,345 r180 top
D274 "WS2812B" *WS2812B_WS2812B(Primary) 6420,345 r180 top
D275 "WS2812B" *WS2812B_WS2812B(Primary) 6020,345 r180 top
D276 "WS2812B" *WS2812B_WS2812B(Primary) 5620,345 r180 top
D277 "WS2812B" *WS2812B_WS2812B(Primary) 5220,345 r180 top
D278 "WS2812B" *WS2812B_WS2812B(Primary) 4820,345 r180 top
D279 "WS2812B" *WS2812B_WS2812B(Primary) 4420,345 r180 top
D280 "WS2812B" *WS2812B_WS2812B(Primary) 4020,345 r180 top
D281 "WS2812B" *WS2812B_WS2812B(Primary) 3620,345 r180 top
D282 "WS2812B" *WS2812B_WS2812B(Primary) 3220,345 r180 top
D283 "WS2812B" *WS2812B_WS2812B(Primary) 2820,345 r180 top
D284 "WS2812B" *WS2812B_WS2812B(Primary) 2420,345 r180 top
D285 "WS2812B" *WS2812B_WS2812B(Primary) 2020,345 r180 top
D286 "WS2812B" *WS2812B_WS2812B(Primary) 1620,345 r180 top
D287 "WS2812B" *WS2812B_WS2812B(Primary) 1220,345 r180 top
D288 "WS2812B" *WS2812B_WS2812B(Primary) 820,345 r180 top
J1 "0022272061" "MOLEX KK 0022272061" 180,2500 r270 top
J2 "0022272021" "MOLEX KK 0022272021" 130,530 r270 top
J3 "1054500101" "Molex 1054500101" 285.39,1079.21 r270 top
R1 "0Ω" "RES 0603_1608" 599.41,4650 r0 top value="0 Ohms"
R2 "0Ω" "RES 0603_1608" 10340,4500 r90 top value="0 Ohms"
R3 "0Ω" "RES 0603_1608" 625,3975.59 r90 top value="0 Ohms"
R4 "0Ω" "RES 0603_1608" 600,3875 r0 top value="0 Ohms"
R5 "0Ω" "RES 0603_1608" 10340,3674.41 r90 top value="0 Ohms"
R6 "0Ω" "RES 0603_1608" 625,3175 r90 top value="0 Ohms"
R7 "0Ω" "RES 0603_1608" 600,3075 r0 top value="0 Ohms"
R8 "0Ω" "RES 0603_1608" 10340,2874.41 r90 top value="0 Ohms"
R9 "0Ω" "RES 0603_1608" 625,2375 r90 top value="0 Ohms"
R10 "0Ω" "RES 0603_1608" 599.41,2275 r0 top value="0 Ohms"
R11 "0Ω" "RES 0603_1608" 10340,2074.41 r90 top value="0 Ohms"
R12 "0Ω" "RES 0603_1608" 625,1575 r90 top value="0 Ohms"
R13 "0Ω" "RES 0603_1608" 600,1475 r0 top value="0 Ohms"
R14 "0Ω" "RES 0603_1608" 10340,1274.41 r90 top value="0 Ohms"
R15 "0Ω" "RES 0603_1608" 625,775 r90 top value="0 Ohms"
R16 "0Ω" "RES 0603_1608" 600,675 r0 top value="0 Ohms"
R17 "0Ω" "RES 0603_1608" 10340,480 r90 top value="0 Ohms"
R18 "5.1kΩ" "RES 0603_1608" 390,1145.59 r90 top value="5.1 kOhms"
R19 "5.1kΩ" "RES 0603_1608" 210,784.41 r270 top value="5.1 kOhms"

## Footprints (in the part's own frame and the unit in brackets; to place one, negate y for a bottom-side part, rotate by r counter-clockwise, add the part's x,y. Pads: shape width x height; smd on the part's side, far side on the other; paste and mask are expansions set on the pad)
*WS2812B_WS2812B(Primary) [mm]
  rect 1.5x0.9 smd: 1-VDD(2.45,-1.65) 2-DOUT(2.45,1.65) 3-GND(-2.45,1.65) 4-DIN(-2.45,-1.65)
  silkscreen extent -2.5,-2.5 2.5,3.2, body extent -2.83,-2.63 2.57,2.37, height 1.59
"CAP 0603_1608" [mm] "Chip Capacitor, 2-Leads, Body 1.60x0.80mm, IPC Medium Density"
  rect 0.9x1 smd: 1(-0.675,0) 2(0.675,0)
  silkscreen extent -1.4,-0.7 1.4,0.7, body extent -0.8,-0.41 0.8,0.41, height 0.82
"Molex 1054500101" [mm] "USB-C Receptacle Connector 24 Position Surface Mount, 24 Position, Body 8.94x7.90mm"
  rect 0.3x0.7 smd: A1(-3,0.655) A2(-2.5,0.655) A3(-2,0.655) A4(-1.5,0.655) A5(-1,0.655) A6(-0.5,0.655) A7(0.5,0.655) A8(1,0.655) A9(1.5,0.655) A10(2,0.655) A11(2.5,0.655) A12(3,0.655) B2(2.25,-0.645) B3(1.75,-0.645) B4(1.25,-0.645) B5(0.75,-0.645) B6(0.25,-0.645) B7(-0.25,-0.645) B8(-0.75,-0.645) B9(-1.25,-0.645) B10(-1.75,-0.645) B11(-2.25,-0.645)
  rect 1x0.7 smd: B1(3.1,-0.655) B12(-3.1,-0.645)
  oval 1.1x2.6 hole 2.1 slot 0.6 at 0 deg: S(-4.34,-5.105) S(4.3,-5.105)
  oval 1.1x2.1 hole 1.6 slot 0.6 at 0 deg: S(-4.32,0.245) S(4.32,0.245)
  silkscreen extent -4.47,-7.07 4.47,0.83, body extent -4.47,-7.06 4.47,0.84, height 3.21
"MOLEX KK 0022272021" [mm]
  oval 2x3 hole 1.2: 1(-1.27,0) 2(1.27,0)
  silkscreen extent -2.54,-2.79 2.54,2.79, body extent -2.54,-2.9 2.54,2.9, height 11.7
"MOLEX KK 0022272061" [mm]
  oval 2x3 hole 1.2: 1(-6.35,0) 2(-3.81,0) 3(-1.27,0) 4(1.27,0) 5(3.81,0) 6(6.35,0)
  silkscreen extent -7.62,-2.79 7.62,2.79, body extent -7.62,-2.9 7.62,2.9, height 11.7
"RES 0603_1608" [mm] "Chip Resistor, 2-Leads, Body 1.60x0.80mm, IPC Medium Density"
  rect 0.85x0.95 smd: 1(-0.65,0) 2(0.65,0)
  silkscreen extent -1.27,-0.7 1.27,0.7, body extent -0.8,-0.4 0.8,0.4, height 0.45

## Part data
C1 C2 C3 C4 C5 C6 C7 C8 C9 C10 C11 C12 C13 C14 C15 C16 C17 C18 C19 C20 C21 C22 C23 C24 C25 C26 C27 C28 C29 C30 C31 C32 C33 C34 C35 C36 C37 C38 C39 C40 C41 C42 C43 C44 C45 C46 C47 C48 C49 C50 C51 C52 C53 C54 C55 C56 C57 C58 C59 C60 C61 C62 C63 C64 C65 C66 C67 C68 C69 C70 C71 C72 C73 C74 C75 C76 C77 C78 C79 C80 C81 C82 C83 C84 C85 C86 C87 C88 C89 C90 C91 C92 C93 C94 C95 C96 C97 C98 C99 C100 C101 C102 C103 C104 C105 C106 C107 C108 C109 C110 C111 C112 C113 C114 C115 C116 C117 C118 C119 C120 C121 C122 C123 C124 C125 C126 C127 C128 C129 C130 C131 C132 C133 C134 C135 C136 C137 C138 C139 C140 C141 C142 C143 C144 C145 C146 C147 C148 C149 C150 C151 C152 C153 C154 C155 C156 C157 C158 C159 C160 C161 C162 C163 C164 C165 C166 C167 C168 C169 C170 C171 C172 C173 C174 C175 C176 C177 C178 C179 C180 C181 C182 C183 C184 C185 C186 C187 C188 C189 C190 C191 C192 C193 C194 C195 C196 C197 C198 C199 C200 C201 C202 C203 C204 C205 C206 C207 C208 C209 C210 C211 C212 C213 C214 C215 C216 C217 C218 C219 C220 C221 C222 C223 C224 C225 C226 C227 C228 C229 C230 C231 C232 C233 C234 C235 C236 C237 C238 C239 C240 C241 C242 C243 C244 C245 C246 C247 C248 C249 C250 C251 C252 C253 C254 C255 C256 C257 C258 C259 C260 C261 C262 C263 C264 C265 C266 C267 C268 C269 C270 C271 C272 C273 C274 C275 C276 C277 C278 C279 C280 C281 C282 C283 C284 C285 C286 C287 C288: library part C0603C104K5RAC7411, "CAP CER 0.1UF 50V X7R 0603", Device Package="0603 (1608 Metric)", Manufacturer=KEMET, Operating Temperature="-55°C ~ 125°C", Supplier Part Number 1=399-C0603C104K5RAC7411CT-ND, Temperature Coefficient=X7R, Tolerance=±10%, Voltage - Rated=50V, Applications="Bypass, Decoupling", Capacitance="0.1 µF", ComponentLink1Description=Datasheet, ComponentLink1URL=https://api.kemet.com/component-edge/download/datasheet/C0603C104K5RAC7411.pdf, ComponentLink2Description="DigiKey Link", ComponentLink2URL=https://www.digikey.com/en/products/detail/kemet/C0603C104K5RAC7411/3317013, LastUpdated="2026-04-06 7:23:52 PM", Lifecycle Status=Active, Minimum Order=1, Mounting Type="Surface Mount, MLCC", Package / Case="0603 (1608 Metric)", Packaging=TapeAndReel, Part Number=C0603C104K5RAC7411, Part Status=Active, PartId=2233, Price=0.01, Series="SMD Comm X7R", Size / Dimension="0.063\" L x 0.031\" W (1.60mm x 0.80mm)", Supplier 1=DigiKey, Thickness (Max)="0.035\" (0.90mm)"
D1 D2 D3 D4 D5 D6 D7 D8 D9 D10 D11 D12 D13 D14 D15 D16 D17 D18 D19 D20 D21 D22 D23 D24 D25 D26 D27 D28 D29 D30 D31 D32 D33 D34 D35 D36 D37 D38 D39 D40 D41 D42 D43 D44 D45 D46 D47 D48 D49 D50 D51 D52 D53 D54 D55 D56 D57 D58 D59 D60 D61 D62 D63 D64 D65 D66 D67 D68 D69 D70 D71 D72 D73 D74 D75 D76 D77 D78 D79 D80 D81 D82 D83 D84 D85 D86 D87 D88 D89 D90 D91 D92 D93 D94 D95 D96 D97 D98 D99 D100 D101 D102 D103 D104 D105 D106 D107 D108 D109 D110 D111 D112 D113 D114 D115 D116 D117 D118 D119 D120 D121 D122 D123 D124 D125 D126 D127 D128 D129 D130 D131 D132 D133 D134 D135 D136 D137 D138 D139 D140 D141 D142 D143 D144 D145 D146 D147 D148 D149 D150 D151 D152 D153 D154 D155 D156 D157 D158 D159 D160 D161 D162 D163 D164 D165 D166 D167 D168 D169 D170 D171 D172 D173 D174 D175 D176 D177 D178 D179 D180 D181 D182 D183 D184 D185 D186 D187 D188 D189 D190 D191 D192 D193 D194 D195 D196 D197 D198 D199 D200 D201 D202 D203 D204 D205 D206 D207 D208 D209 D210 D211 D212 D213 D214 D215 D216 D217 D218 D219 D220 D221 D222 D223 D224 D225 D226 D227 D228 D229 D230 D231 D232 D233 D234 D235 D236 D237 D238 D239 D240 D241 D242 D243 D244 D245 D246 D247 D248 D249 D250 D251 D252 D253 D254 D255 D256 D257 D258 D259 D260 D261 D262 D263 D264 D265 D266 D267 D268 D269 D270 D271 D272 D273 D274 D275 D276 D277 D278 D279 D280 D281 D282 D283 D284 D285 D286 D287 D288: "Intelligent control LED integrated light source", Package=None, Check_prices=https://www.snapeda.com/parts/WS2812B/Worldsemi/view-part/?ref=eda, MF=Worldsemi, MP=WS2812B, SnapEDA_Link=https://www.snapeda.com/parts/WS2812B/Worldsemi/view-part/?ref=snap
J1: "CONN HEADER VERT 6POS 2.54MM", Insulation Color=Natural, Manufacturer=Molex, Material Flammability Rating="UL94 V-0", Supplier Part Number 1=WM4115-ND, ComponentLink1Description=Datasheet, ComponentLink1URL=https://www.molex.com/pdm_docs/sd/022272061_sd.pdf, ComponentLink2Description="DigiKey Link", ComponentLink2URL=http://digikey.com/product-detail/en/molex/0022272061/WM4115-ND/1130581, Connector Type=Header, Contact Finish - Mating=Tin, Contact Finish - Post=Tin, Contact Finish Thickness - Mating="100.0µin (2.54µm)", Contact Length - Mating="0.295\" (7.49mm)", Contact Length - Post="0.140\" (3.56mm)", Contact Material=Brass, Contact Shape=Square, Contact Type="Male Pin", Fastening Type="Friction Lock", Insulation Height="0.461\" (11.70mm)", Insulation Material="Polyamide (PA), Nylon", LastUpdated="2020-01-12 11:52:24 PM", Lifecycle Status=Active, Minimum Order=1, Mounting Type="Through Hole", Number of Positions=6, Number of Positions Loaded=All, Number of Rows=1, Overall Contact Length="0.560\" (14.22mm)", Packaging=Bulk, Part Number=0022272061, Part Status=Active, PartId=80, Pitch - Mating="0.100\" (2.54mm)", Price=0.49, Series="KK 6410", Shrouding="Shrouded - 1 Wall", Style="Board to Cable/Wire", Supplier 1=DigiKey, Termination=Solder
J2: "CONN HEADER VERT 2POS 2.54MM", Insulation Color=Natural, Manufacturer=Molex, Material Flammability Rating="UL94 V-0", Supplier Part Number 1=WM4111-ND, ComponentLink1Description=Datasheet, ComponentLink1URL=https://www.molex.com/pdm_docs/sd/022272021_sd.pdf, ComponentLink2Description="DigiKey Link", ComponentLink2URL=http://digikey.com/product-detail/en/molex/0022272021/WM4111-ND/1130577, Connector Type=Header, Contact Finish - Mating=Tin, Contact Finish - Post=Tin, Contact Finish Thickness - Mating="100.0µin (2.54µm)", Contact Length - Mating="0.295\" (7.49mm)", Contact Length - Post="0.140\" (3.56mm)", Contact Material=Brass, Contact Shape=Square, Contact Type="Male Pin", Fastening Type="Friction Lock", Insulation Height="0.461\" (11.70mm)", Insulation Material="Polyamide (PA), Nylon", LastUpdated="2020-01-12 11:51:43 PM", Lifecycle Status=Active, Minimum Order=1, Mounting Type="Through Hole", Number of Positions=2, Number of Positions Loaded=All, Number of Rows=1, Overall Contact Length="0.560\" (14.22mm)", Packaging=Bulk, Part Number=0022272021, Part Status=Active, PartId=76, Pitch - Mating="0.100\" (2.54mm)", Price=0.27, Series="KK 6410", Shrouding="Shrouded - 1 Wall", Style="Board to Cable/Wire", Supplier 1=DigiKey, Termination=Solder
J3: "CONN RCP USB3.1 TYPEC 24P SMD RA", Current Rating (Amps)="0.25A, 1A, 5A", Manufacturer=Molex, Operating Temperature="-30°C ~ 85°C", Supplier Part Number 1=WM12856CT-ND, Voltage - Rated=30VAC/DC, ComponentLink1Description=Datasheet, ComponentLink1URL=https://www.molex.com/pdm_docs/ps/PS-105448-001.pdf, ComponentLink2Description="DigiKey Link", ComponentLink2URL=http://digikey.com/product-detail/en/molex/1054500101/WM12856CT-ND/5843891, Connector Type="USB - C (Type - C)", Gender=Receptacle, LastUpdated="2020-06-06 2:14:04 AM", Lifecycle Status=Active, Mating Cycles=10000, Minimum Order=1, Mounting Feature=Horizontal, Mounting Type="Surface Mount, Right Angle; Through Hole", Number of Contacts=24, Number of Ports=1, Packaging=TapeAndReel, Part Number=1054500101, Part Status=Active, Price=1.22, Series=105445, Shielding=Shielded, Specifications="USB 3.1 (USB 3.1 Gen 2, Superspeed+)", Supplier 1=DigiKey, Termination=Solder
R1 R2 R3 R4 R5 R6 R7 R8 R9 R10 R11 R12 R13 R14 R15 R16 R17: library part YJP1608-R001, "RES SMD 0 OHM JUMPER 0603", Device Package="0603 (1608 Metric)", Manufacturer=Susumu, Operating Temperature="-40°C ~ 125°C", Resistance="0 Ohms", Supplier Device Package=0603, Supplier Part Number 1=408-1515-1-ND, Tolerance=Jumper, ComponentLink1Description=Datasheet, ComponentLink1URL=http://www.susumu.co.jp/common/pdf/n_catalog_partition10_en.pdf, ComponentLink2Description="DigiKey Link", ComponentLink2URL=https://www.digikey.com/en/products/detail/susumu/YJP1608-R001/2815047, Composition="Thin Film", Height - Seated (Max)="0.016\" (0.40mm)", LastUpdated="2024-02-09 8:42:50 PM", Lifecycle Status=Active, Minimum Order=1, Number of Terminations=2, Package / Case="0603 (1608 Metric)", Packaging=TapeAndReel, Part Number=YJP1608-R001, Part Status=Active, PartId=16802, Price=0.08, Series=YJP, Size / Dimension="0.063\" L x 0.031\" W (1.60mm x 0.80mm)", Supplier 1=DigiKey
R18 R19: library part AC0603FR-075K1L, "RES SMD 5.1K OHM 1% 1/10W 0603", Device Package="0603 (1608 Metric)", Manufacturer=Yageo, Operating Temperature="-55°C ~ 155°C", Power (Watts)="0.1W, 1/10W", Ratings=AEC-Q200, Resistance="5.1 kOhms", Supplier Device Package=0603, Supplier Part Number 1=YAG3621CT-ND, Temperature Coefficient=±100ppm/°C, Tolerance=±1%, ComponentLink1Description=Datasheet, ComponentLink1URL=https://www.yageo.com/upload/media/product/productsearch/datasheet/rchip/PYu-AC_51_RoHS_L_7.pdf, ComponentLink2Description="DigiKey Link", ComponentLink2URL=https://www.digikey.com/en/products/detail/yageo/AC0603FR-075K1L/5896209, Composition="Thick Film", Features="Automotive AEC-Q200, Moisture Resistant", Height - Seated (Max)="0.022\" (0.55mm)", LastUpdated="2026-04-06 7:43:48 PM", Lifecycle Status=Active, Minimum Order=1, Number of Terminations=2, Package / Case="0603 (1608 Metric)", Packaging=CutTape, Part Number=AC0603FR-075K1L, Part Status=Active, PartId=17442, Price=0.01, Series=AC, Size / Dimension="0.063\" L x 0.031\" W (1.60mm x 0.80mm)", Supplier 1=DigiKey

## Free pads (board coordinates)
  round 175 hole 125 mask+0: 7(150,150) 7(150,4850) 7(10500,150) 7(10500,4850)